# Allegro board PROIECT FINAL TIE.brd
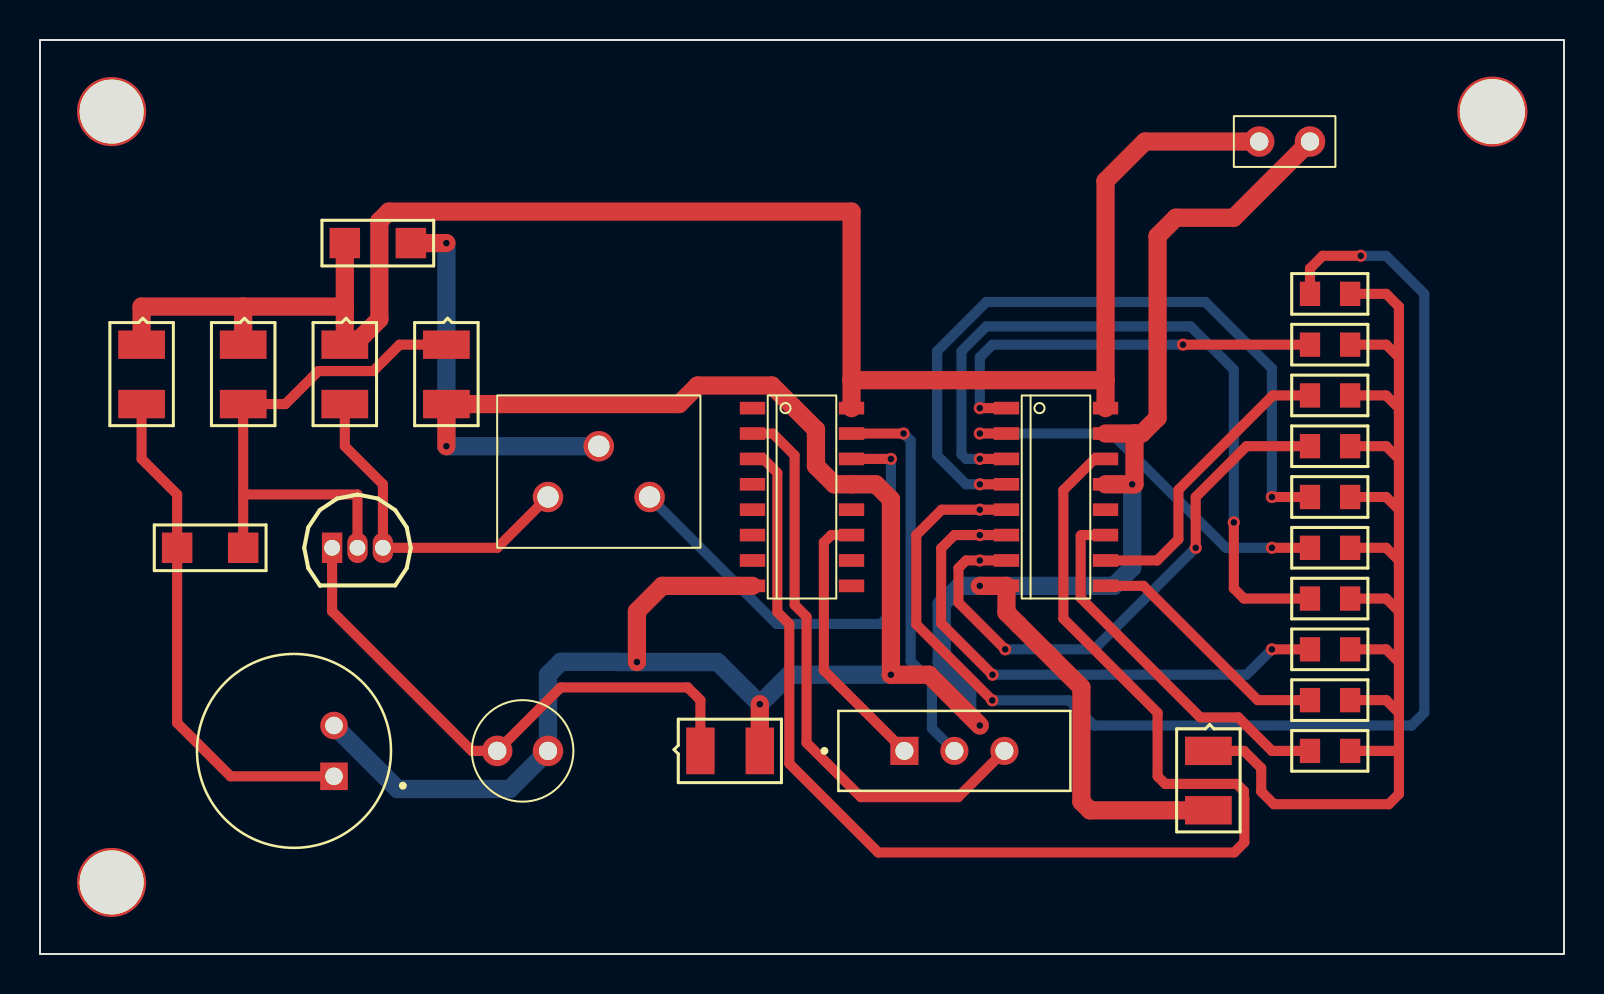
[diagram p0: board, top side]
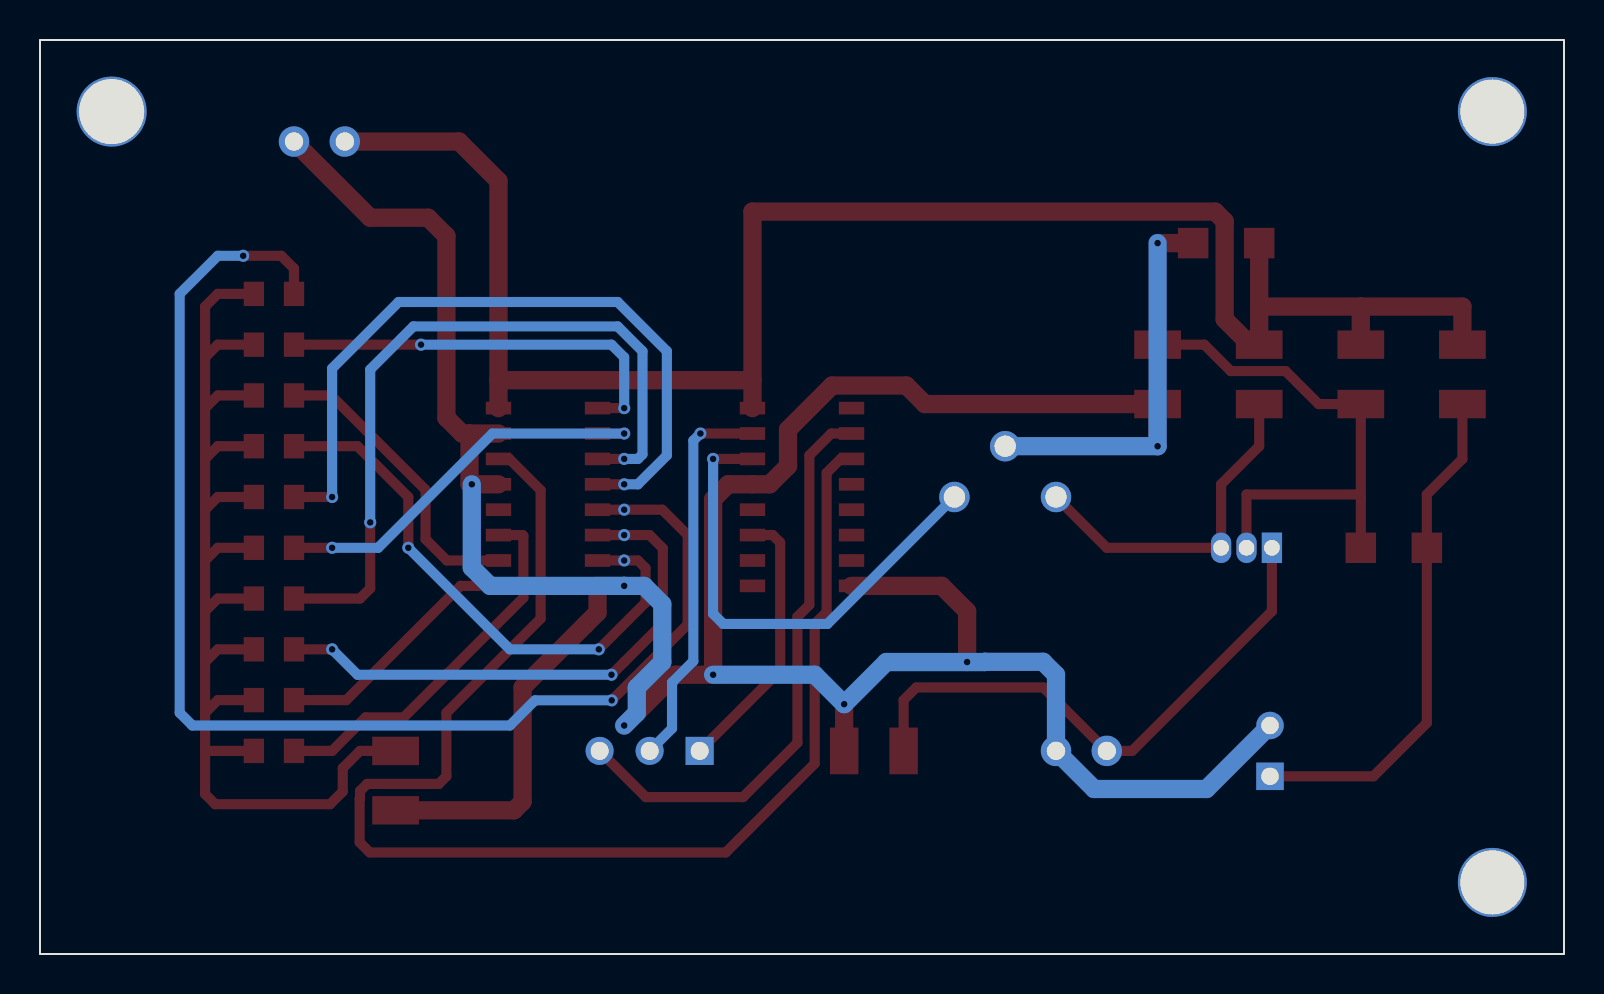
[diagram p1: board, bottom side, seen from below]

Outline 76.2 x 45.72 mm; copper layers: TOP, BOTTOM. Coordinates in mm from the lower left corner of the outline.
Outline path: rectangle 0,0 76.2,45.72

## Design rules (mm)
nets with their own width: min track width 0.508; nets N01138 N02847 N02937 N02945 N03485 N03522 N04274 N04307 N004373 N004374 N004375 N004376 N004377 N004378 N004379 N04445 N04471 N0043710 N0043711 N0043712
nets with their own width: min track width 0.914; nets GND VCC

## Placement (name value [footprint] x y rotation side)
C1  330n  [SMC1206]  10.16 20.32 180 top
C2  100u  [CAP196]  22.86 10.16 270 top
C3  100n  [SMC1206]  15.24 35.56 0 top
D1  LED  [SML0805]  63.5 33.02 0 top
D2  LED  [SML0805]  63.5 30.48 0 top
D3  LED  [SML0805]  63.5 27.94 0 top
D4  LED  [SML0805]  63.5 25.4 0 top
D5  LED  [SML0805]  63.5 22.86 0 top
D6  LED  [SML0805]  63.5 20.32 0 top
D7  LED  [SML0805]  63.5 17.78 0 top
D8  LED  [SML0805]  63.5 15.24 0 top
D9  LED  [SML0805]  63.5 12.7 0 top
D10  LED  [SML0805]  63.5 10.16 0 top
IC1  4017  [SOIC16]  38.1 22.86 0 top
IC2  4017  [SOIC16]  50.8 22.86 0 top
J1  CON2  [JUMPER2]  60.96 40.64 0 top
MIC1  CMA-4544PF-W  [MIC_CMA-4544PF-W]  12.7 10.16 0 top
NOREF  -  [unnamed]  3.58 3.58 0 top
NOREF#2  -  [#2]  0 45.72 0 top
NOREF#3  -  [unnamed#2]  72.62 42.14 0 top
NOREF#4  -  [#2]  0 0 90 top
NOREF#5  -  [unnamed]  3.58 42.14 0 top
P1  -  [POT]  25.4 22.86 0 top
R1  2.2k  [SMD120612]  5.08 30.48 270 top
R2  100k  [SMD120612]  10.16 30.48 270 top
R3  12k  [SMD120612]  20.32 30.48 270 top
R4  5.6k  [SMD120612]  15.24 30.48 270 top
R5  560  [SMD120612]  58.42 10.16 270 top
R6  560  [SMD120612]  33.02 10.16 0 top
S1  MINI-SPDT-SW  [SW_MINI-SPDT-SW]  45.72 10.16 0 top
T1  BC547  [TO92]  14.61 20.32 0 top

## Library data of the parts
C1 C3 = CAPACITOR NON-POL
C2 = CAPACITOR POL
D1-D10 = LED
IC1 IC2 = 4017_4
J1 = CON2_0
MIC1 = CMA-4544PF-W
P1 = POT
R1-R6 = R
S1 = MINI-SPDT-SW
T1 = BC547

## Footprints (pads in the part's own frame, mm; a bottom-side part is the same pattern mirrored in y, then rotated)
CAP196
  round 1.524 hole 0.914: 1(0,0) 2(0,2.54)
JUMPER2
  round 1.524 hole 0.914: 1(0,0) 2(2.54,0)
MIC_CMA-4544PF-W
  rect 1.378x1.378 hole 0.87: 1(2,-1.27)
  round 1.378 hole 0.87: 2(2,1.27)
POT
  round 1.524 hole 1.067: 1(0,0) 2(5.08,0) 3(2.54,2.54)
SMC1206
  rect 1.524x1.524 smd: 1(0,0) 2(3.302,0)
SMD120612
  rect 1.422x2.337 smd: 1(0,0) 2(2.972,0)
SML0805
  rect 1.016x1.219 smd: 1(0,0) 2(2.007,0)
SOIC16
  rect 1.27x0.635 smd: 1(-2.477,4.445) 2(-2.477,3.175) 3(-2.477,1.905) 4(-2.477,0.635) 5(-2.477,-0.635) 6(-2.477,-1.905) 7(-2.477,-3.175) 8(-2.477,-4.445) 9(2.477,-4.445) 10(2.477,-3.175) 11(2.477,-1.905) 12(2.477,-0.635) 13(2.477,0.635) 14(2.477,1.905) 15(2.477,3.175) 16(2.477,4.445)
SW_MINI-SPDT-SW
  rect 1.408x1.408 hole 0.9: 1(-2.5,0)
  round 1.408 hole 0.9: 2(0,0) 3(2.5,0)
TO92
  rect 1.016x1.524 hole 0.787: 1(0,0)
  oval 1.016x1.524 hole 0.787: 2(1.27,0) 3(2.54,0)
unnamed
  round 3.454 hole 3.2 unplated: (0,0)
unnamed#2
  round 3.505 hole 3.251 unplated: (0,0)

## Nets
GND: C2.2 C3.2 IC1.8 IC1.13 IC2.8 IC2.13 IC2.15 J1.2 MIC1.2 P1.3 R3.2 R5.2 R6.2
VCC: C3.1 IC1.16(VCC) IC2.16(VCC) J1.1 R1.1 R2.1 R4.1
N01138: D1.2(CATHODE) D2.2(CATHODE) D3.2(CATHODE) D4.2(CATHODE) D5.2(CATHODE) D6.2(CATHODE) D7.2(CATHODE) D8.2(CATHODE) D9.2(CATHODE) D10.2(CATHODE) R5.1
N02847: IC1.3 IC2.14
N02937: IC1.11 S1.1
N02945: IC1.2 S1.3
N03485: IC1.15 S1.2
N03522: IC1.14 P1.2(WIPER)
N04274: P1.1 R4.2 T1.3
N04307: C2.1 R6.1 T1.1(EMITTER)
N004373: D7.1 IC2.3
N004374: D6.1 IC2.2
N004375: D5.1 IC2.4
N004376: D4.1 IC2.7
N004377: D3.1 IC2.10
N004378: D2.1 IC2.1
N004379: D1.1 IC2.5
N04445: C1.1 R2.2 R3.1 T1.2
N04471: C1.2 MIC1.1(OUT) R1.2
N0043710: D8.1 IC2.6
N0043711: D9.1 IC2.9
N0043712: D10.1 IC2.11

Pads without a net: IC1 1 4 5 6 7 9 10 12; IC2 12

## Via types
v1: diameter 0.61, hole 0.33, TOP to BOTTOM, 27 vias

## Routing (per net, layer and track width the routed paths; a pad name or vN(x,y) marks a point on that pad's centre or on a via; arc(x,y) is an arc through that point)
GND: length 175.8
  TOP w0.914: 54.72,26.04 IC2.15 ; 54.72,26.04 54.72,23.5 v1(54.61,23.5) IC2.13 ; 54.72,26.04 55.09,26.04 55.88,26.82 55.88,35.92 56.79,36.83 59.69,36.83 J1.2 ; v1(29.84,14.61) 29.84,17.14 31.11,18.41 IC1.8 ; v1(46.99,18.41) IC2.8 48.32,17.08 48.92,16.48 52.07,13.33 52.07,7.62 52.5,7.19 R5.2 ; R6.2 v1(35.99,12.5) ; v1(46.99,11.43) 44.45,13.97 v1(42.55,13.97) 42.55,22.75 41.8,23.5 IC1.13 39.71,23.5 38.8,24.41 38.8,26.23 36.6,28.44 32.88,28.44 31.95,27.51 R3.2 v1(20.32,25.4) ; C3.2 v1(20.32,35.56)
  BOTTOM w0.914: v1(46.99,11.43) 46.36,12.06 46.36,13.33 45.09,14.61 45.09,17.5 46,18.41 v1(46.99,18.41) 53.7,18.41 54.61,19.33 v1(54.61,23.5) ; MIC1.2 17.87,8.26 23.5,8.26 C2.2 25.4,13.97 26.05,14.62 28.94,14.62 28.96,14.61 v1(29.84,14.61) 33.88,14.61 v1(35.99,12.5) 37.47,13.97 v1(42.55,13.97) ; P1.3 v1(20.32,25.4) v1(20.32,35.56)
VCC: length 92.4
  TOP w0.914: R1.1 5.08,32.38 10.16,32.38 ; IC1.16 40.58,28.7 ; 40.58,28.7 53.28,28.7 ; 40.58,28.7 40.58,37.13 17.44,37.13 16.97,36.66 16.97,31.75 15.7,30.48 R4.1 15.24,32.38 ; 53.28,28.7 IC2.16 ; 53.28,28.7 53.28,38.67 55.24,40.64 J1.1 ; 15.24,32.38 10.16,32.38 ; 15.24,32.38 C3.1 ; 10.16,32.38 R2.1
N01138: length 62.7
  TOP w0.508: 67.94,14.61 67.94,17.14 ; 67.94,14.61 67.31,15.24 D8.2 ; 67.94,14.61 67.94,12.06 ; 67.94,17.14 67.31,17.78 D7.2 ; 67.94,17.14 67.94,19.68 ; 67.94,24.77 67.31,25.4 D4.2 ; 67.94,24.77 67.94,27.3 ; 67.94,24.77 67.94,22.23 ; D1.2 67.31,33.02 67.94,32.38 67.94,29.84 ; R5.1 60.2,10.16 61.06,9.3 61.06,8.13 61.7,7.49 67.44,7.49 67.94,8 67.94,10.16 ; D3.2 67.31,27.94 67.94,27.3 ; D5.2 67.31,22.86 67.94,22.23 ; D6.2 67.31,20.32 67.94,19.68 ; 67.94,10.16 67.94,12.06 ; 67.94,10.16 D10.2 ; 67.94,27.3 67.94,29.84 ; 67.94,29.84 67.31,30.48 D2.2 ; 67.94,12.06 67.31,12.7 D9.2 ; 67.94,22.23 67.94,19.68
N02847: length 67.3
  TOP w0.508: IC2.14 52.73,24.77 51.17,23.2 51.17,16.78 55.88,12.06 55.88,8.89 56.26,8.51 59.84,8.51 60.2,8.15 60.2,7.77 60.22,7.75 60.22,5.59 59.71,5.08 41.91,5.08 37.47,9.53 37.47,16.51 36.87,17.11 36.87,24.07 36.17,24.77 IC1.3
N02937: length 13.6
  TOP w0.508: IC1.11 39.56,20.95 39.19,20.59 39.19,14.19 S1.1
N02945: length 29.2
  TOP w0.508: IC1.2 36.64,26.04 37.73,24.94 37.73,17.46 38.33,16.87 38.33,10.57 41.05,7.85 45.91,7.85 S1.3
N03485: length 19.5
  TOP w0.508: IC1.15 v1(43.18,26.04)
  BOTTOM w0.508: S1.2 44.6,11.28 44.6,13.58 43.53,14.65 43.53,25.68 v1(43.18,26.04)
N03522: length 24.6
  TOP w0.508: v1(42.55,24.77) IC1.14
  BOTTOM w0.508: v1(42.55,24.77) 42.55,17.02 42.04,16.51 36.83,16.51 P1.2
N04274: length 17.3
  TOP w0.508: R4.2 15.24,25.4 17.14,23.5 T1.3 22.86,20.32 P1.1
N04307: length 28.6
  TOP w0.508: R6.1 33.02,12.7 32.38,13.34 26.04,13.34 C2.1 21.59,10.16 14.61,17.14 T1.1
N004373: length 37.5
  TOP w0.508: IC2.3 v1(46.99,24.77) ; D7.1 60.2,17.78 59.69,18.29 v1(59.69,21.59)
  BOTTOM w0.508: v1(46.99,24.77) 46.3,24.77 46.08,24.99 46.08,30.15 47.32,31.39 57.53,31.39 59.69,29.23 v1(59.69,21.59)
N004374: length 20.2
  TOP w0.508: v1(61.59,20.32) D6.1 ; IC2.2 v1(46.99,26.04)
  BOTTOM w0.508: v1(61.59,20.32) 59.29,20.32 53.58,26.04 v1(46.99,26.04)
N004375: length 36.7
  TOP w0.508: v1(61.59,22.86) D5.1 ; IC2.4 v1(46.99,23.5)
  BOTTOM w0.508: v1(46.99,23.5) 46.3,23.5 44.86,24.94 44.86,30.15 47.32,32.61 58.27,32.61 61.59,29.29 v1(61.59,22.86)
N004376: length 28.5
  TOP w0.508: v1(57.78,20.32) 57.78,22.86 60.33,25.4 D4.1 ; v1(48.26,15.24) 45.92,17.58 45.92,19.3 46.3,19.68 v1(46.99,19.68) IC2.7
  BOTTOM w0.508: v1(57.78,20.32) 52.7,15.24 v1(48.26,15.24)
N004377: length 15.1
  TOP w0.508: D3.1 61.64,27.94 56.92,23.22 56.92,20.75 55.86,19.68 IC2.10
N004378: length 20.6
  TOP w0.508: IC2.1 v1(46.99,27.3) ; v1(57.15,30.48) D2.1
  BOTTOM w0.508: v1(46.99,27.3) 46.99,29.84 47.62,30.48 v1(57.15,30.48)
N004379: length 66.3
  TOP w0.508: D1.1 63.5,34.29 64.14,34.92 v1(66.04,34.92) ; v1(47.61,12.69) 43.81,16.49 43.81,20.95 45.09,22.23 v1(46.99,22.23) IC2.5
  BOTTOM w0.508: v1(47.61,12.69) 51.45,12.69 52.7,11.43 68.58,11.43 69.22,12.06 69.22,33.02 67.31,34.92 v1(66.04,34.92)
N04445: length 27
  TOP w0.508: C1.1 10.16,22.86 ; 10.16,22.86 10.29,22.99 15.88,22.99 T1.2 ; 10.16,22.86 R2.2 12.27,27.51 13.92,29.16 16.66,29.16 17.98,30.48 R3.1
N04471: length 25.6
  TOP w0.508: R1.2 5.08,24.77 6.86,22.99 C1.2 6.86,11.56 9.53,8.89 MIC1.1
N0043710: length 27.3
  TOP w0.508: IC2.6 v1(46.99,20.95) 45.72,20.95 45.06,20.29 45.06,16.54 46.99,14.61 v1(47.62,13.97) ; v1(61.59,15.24) D8.1
  BOTTOM w0.508: v1(61.59,15.24) 60.33,13.97 v1(47.62,13.97)
N0043711: length 12.6
  TOP w0.508: D9.1 60.88,12.7 55.17,18.41 IC2.9
N0043712: length 19
  TOP w0.508: D10.1 61.59,10.16 59.92,11.84 58.01,11.84 52.03,17.82 52.03,20.92 52.07,20.95 IC2.11

## Text on the board
XSECTION_CHART: 1-2 | *  SURFACE - AIR 0 MIL | L1 TOP CONDUCTOR - COPPER 1.2 MIL | *  DIELECTRIC - FR-4 8 MIL | L2 BOTTOM CONDUCTOR - COPPER 1.2 MIL | DESIGN CROSS SECTION CHART | ___________________________ | TOTAL THICKNESS 10.4 MIL
DIMENSION: FIGURE | FINISHED_SIZE | 13.0 | 31.0 | 34.25 | 35.43 | 36.0 | 42.0 | 128.0 | DRILL CHART: TOP to BOTTOM | ALL UNITS ARE IN MILS | PLATED | NON-PLATED | QTY | 27 | 3 | 2 | 4
